# Altium PCB PCB1.PcbDoc
Units mm, origin at the board's own origin, x right, y up, seen from the top; angles counter-clockwise.
Board outline 99.5 x 140.6 mm, 2 copper layers (Top Layer, Bottom Layer); 18 components, 14 nets, 40 pads, 24 vias.
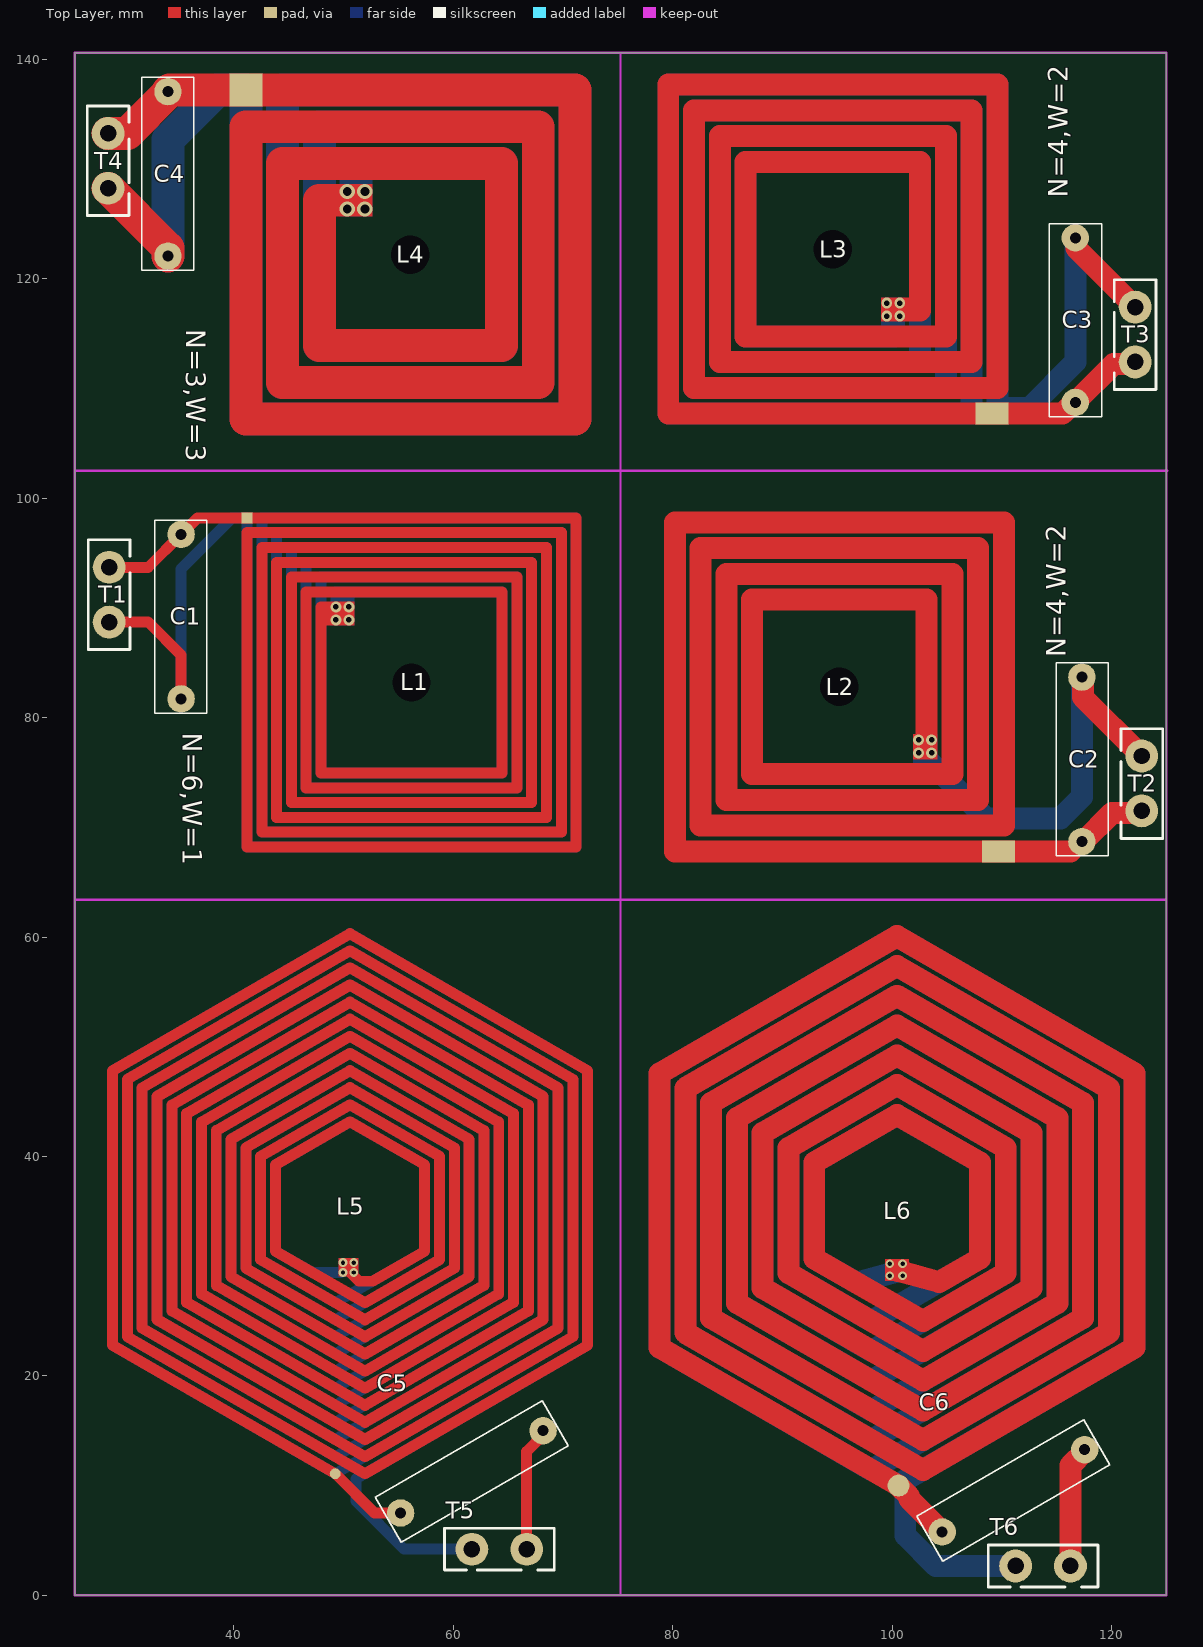
[diagram p0: Top Layer view]
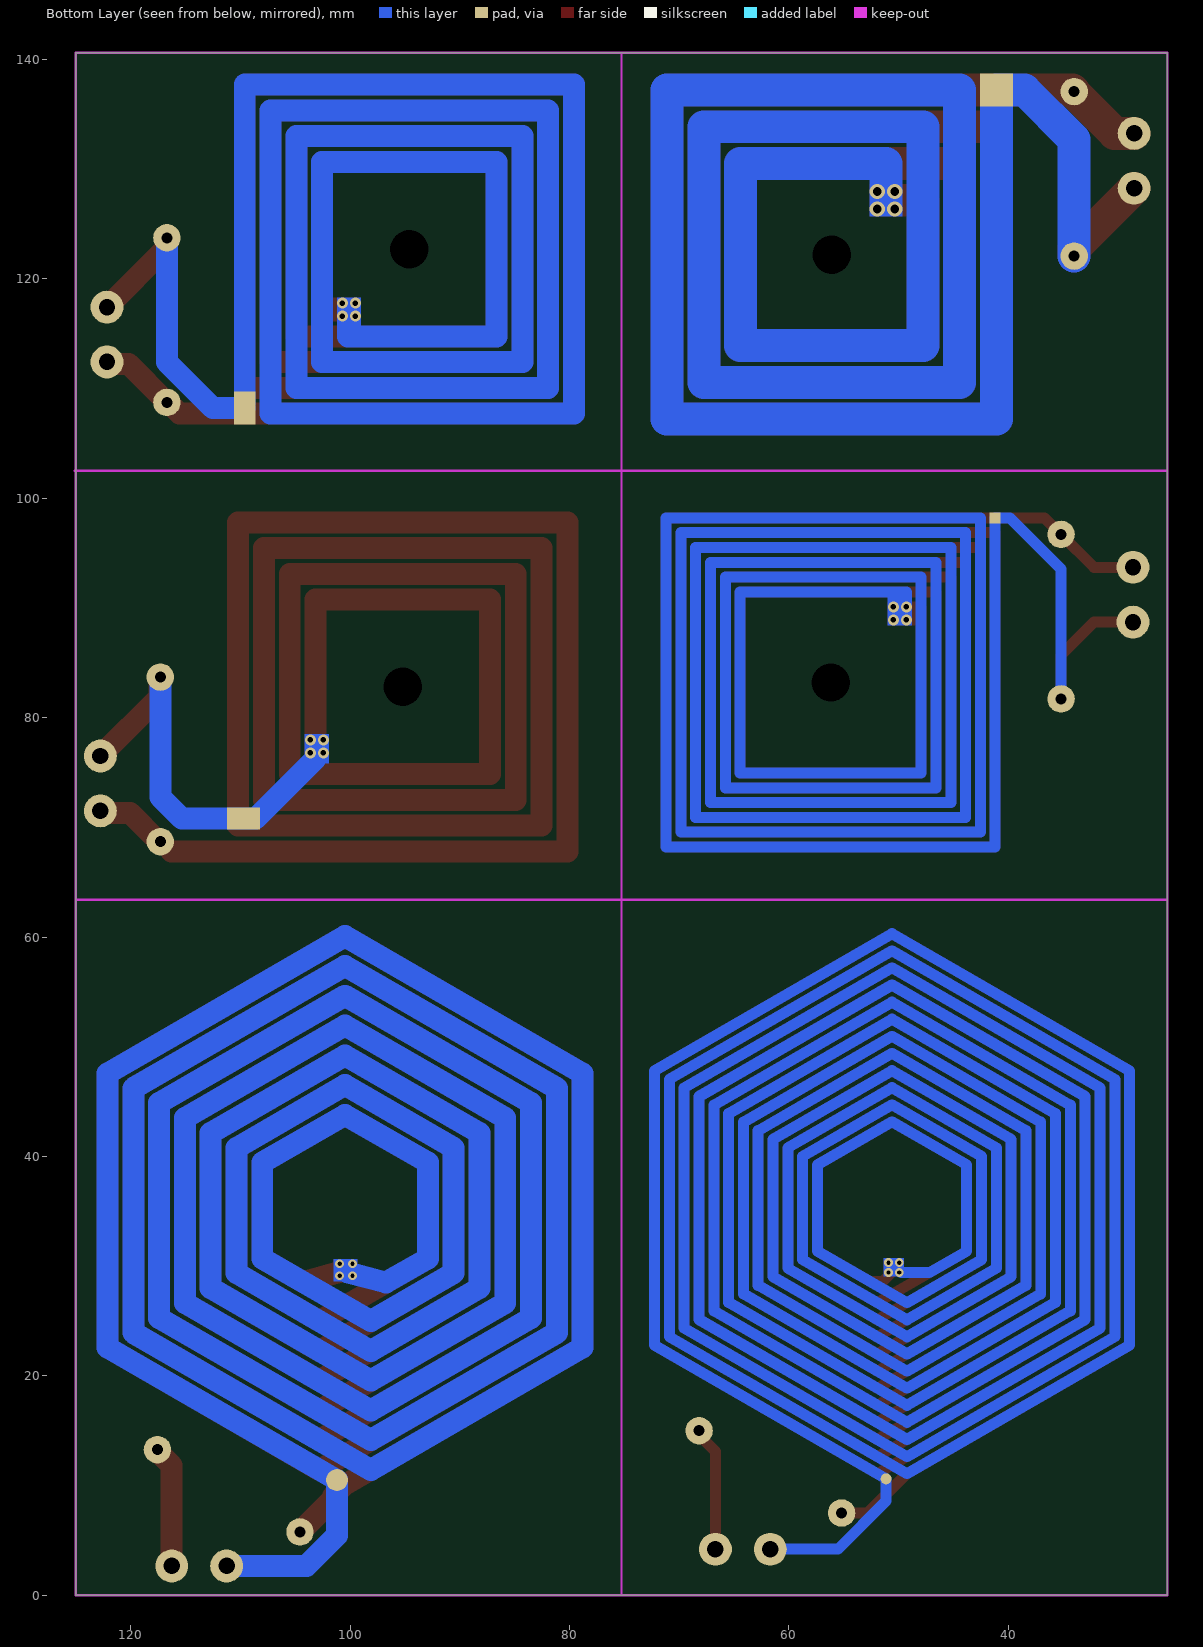
[diagram p1: Bottom Layer view, seen from below]

## Layer stack, top to bottom
Top Solder: solder mask 0.0102, Solder Resist, Dk 3.5
Top Layer: signal copper 0.0356
Dielectric 1: dielectric 0.32, FR-4, Dk 4.8
Bottom Layer: signal copper 0.0356
Bottom Solder: solder mask 0.0102, Solder Resist, Dk 3.5

## Board outline
25.5,0 125,0 125,140.6 25.5,140.6

## Design rules (kind name [scope] priority, off if disabled: settings)
Clearance [All] p1: gap=0.35 ignorepadtopadclearanceinfootprint=FALSE except(0: Arc-Hole Track-Hole SMDPad-Hole THPad-Hole Via-Hole Fill-Hole Poly-Hole Region-Hole Text-Hole)
PolygonConnect [All] p1: connectstyle=Relief reliefconductorwidth=0.254 reliefentries=4 polygonreliefangle="90 Angle" airgapwidth=0.254
RoomDefinition Sheet1 [InComponentClass('Sheet1')] p1 off: confinementstyle=ConfineIn formatcopy=TRUE lockcomponents=FALSE outline 134.4,0 174.457,0 174.457,35.941 134.4,35.941
RoutingVias [All] p1: holewidth=0.7 width=1.5 viastyle="Through Hole" minholewidth=0.5 minwidth=1 maxholewidth=1.5 maxwidth=3
SolderMaskExpansion [All] p1: expansion=0.102 istentingtop=FALSE
Width [All] p1: maxlimit=3 minlimit=0.2 preferedwidth=0.3
30 further rules are at their usual default settings.

## Components (designator, comment, footprint, x,y, rotation, side; value= is the part's Value field where it differs from the comment)
C1 "Cap" CAP_MKT 35.2,96.7 r270 top value=100pF
C2 "Cap" CAP_MKT 117.298,68.689 r90 top value=100pF
C3 "Cap" CAP_MKT 116.698,108.73 r90 top value=100pF
C4 "Cap" CAP_MKT 34.002,137.059 r270 top value=100pF
C5 "Cap" CAP_MKT 68.19,15 r210 top value=100pF
C6 "Cap" CAP_MKT 117.558,13.272 r210 top value=100pF
L1 "PCB coil" COIL_30*30_1MM_2LAYER 56.2,83.2 r0 top net-tie value=10mH
L2 "PCB coil" COIL_30*30_2MM_1LAYER 95.2,82.8 r180 top net-tie value=10mH
L3 "PCB coil" COIL_30*30_2MM_2LAYER 94.6,122.7 r180 top net-tie value=10mH
L4 "PCB coil" COIL_30*30_3MM_2LAYER 56.1,122.2 r0 top net-tie value=10mH
L5 "PCB coil" COIL_HEX_50*50_2layer 50.6,35.3 r90 top net-tie value=10mH
L6 "PCB coil" COIL_HEX_50*50_2LAYER_2mm 100.458,35.072 r90 top net-tie value=10mH
T1 "Terminal" "Terminal 1*2_coil" 30.546,86.207 r90 top
T2 "Terminal" "Terminal 1*2_coil" 120.854,78.99 r270 top
T3 "Terminal" "Terminal 1*2_coil" 120.254,119.906 r270 top
T4 "Terminal" "Terminal 1*2_coil" 30.446,125.756 r90 top
T5 "Terminal" "Terminal 1*2_coil" 59.207,2.295 r0 top
T6 "Terminal" "Terminal 1*2_coil" 108.765,0.767 r0 top

## Footprints (in the part's own frame and the unit in brackets; to place one, negate y for a bottom-side part, rotate by r counter-clockwise, add the part's x,y. Pads: shape width x height; smd on the part's side, far side on the other; paste and mask are expansions set on the pad)
CAP_MKT [mm]
  round 2.5 hole 1: 1(0,0) 2(15,0)
  silkscreen extent -1.29,-2.4 16.3,2.35
COIL_30*30_1MM_2LAYER [mm]
  rect 1x1 smd mask+0.05: 1(-15,15)
  rect 1x1 smd far side mask+0.05: 2(-15,15)
  round 0 hole 3.5: S(0,0)
  Top Layer region: -7.9,5.2 -5.2,5.2 -5.2,7.4 -7.9,7.4
  Top Layer lines w1: -15,15 15,15 15,-15 -15,-15 -15,13.65 13.65,13.65 13.65,-13.65 -13.65,-13.65 -13.65,12.3 12.3,12.3 12.3,-12.3 -12.3,-12.3 -12.3,10.95 10.95,10.95 10.95,-10.95 -10.95,-10.95 -10.95,9.6 9.6,9.6 9.6,-9.6 -9.6,-9.6 -9.6,8.25 8.25,8.25 8.25,-8.25 -8.25,-8.25 -8.25,6.9 -6.9,6.9
  Bottom Layer region: -7.4,5.2 -5.2,5.2 -5.2,8.2 -7.4,8.2
  Bottom Layer lines w1: -15,15 -15,-15 15,-15 15,15 -13.65,15 -13.65,-13.65 13.65,-13.65 13.65,13.65 -12.3,13.65 -12.3,-12.3 12.3,-12.3 12.3,12.3 -10.95,12.3 -10.95,-10.95 10.95,-10.95 10.95,10.95 -9.6,10.95 -9.6,-9.6 9.6,-9.6 9.6,9.6 -8.25,9.6 -8.25,-8.25 8.25,-8.25 8.25,8.25 -6.9,8.25 -6.9,6.9
COIL_30*30_2MM_1LAYER [mm]
  rect 3x2 smd mask+0.05: 1(-14.5,15)
  rect 3x2 smd far side mask+0.05: 2(-14.5,12)
  round 0 hole 3.5: S(0,0)
  Top Layer region: -8.95,4.3 -6.7,4.3 -6.7,6.6 -8.95,6.6
  Top Layer lines w2: -7.95,5.6 -7.95,-7.95 7.95,-7.95 7.95,7.95 -10.3,7.95 -10.3,-10.3 10.3,-10.3 10.3,10.3 -12.65,10.3 -12.65,-12.65 12.65,-12.65 12.65,12.65 -15,12.65 -15,-15 15,-15 15,15 -14.5,15
  Bottom Layer region: -8.95,4.3 -6.7,4.3 -6.7,7 -8.95,7
  Bottom Layer lines w2: -7.95,5.6 -7.95,6.553 -13.397,12 -15,12
COIL_30*30_2MM_2LAYER [mm]
  rect 3x2 smd mask+0.05: 1(-14.5,15)
  rect 2x3 smd far side mask+0.05: 2(-15,14.5)
  round 0 hole 3.5: S(0,0)
  Top Layer region: -7.1,4.4 -4.4,4.4 -4.4,6.6 -7.1,6.6
  Top Layer lines w2: -5.6,5.6 -7.95,5.6 -7.95,-7.95 7.95,-7.95 7.95,7.95 -10.3,7.95 -10.3,-10.3 10.3,-10.3 10.3,10.3 -12.65,10.3 -12.65,-12.65 12.65,-12.65 12.65,12.65 -15,12.65 -15,-15 15,-15 15,15 -14.5,15
  Bottom Layer region: -6.6,4.4 -4.4,4.4 -4.4,7.4 -6.6,7.4
  Bottom Layer lines w2: -5.6,5.6 -5.6,7.95 7.95,7.95 7.95,-7.95 -7.95,-7.95 -7.95,10.3 10.3,10.3 10.3,-10.3 -10.3,-10.3 -10.3,12.65 12.65,12.65 12.65,-12.65 -12.65,-12.65 -12.65,15 15,15 15,-15 -15,-15 -15,13.97
COIL_30*30_3MM_2LAYER [mm]
  rect 3x3 smd mask+0.05: 1(-15,15)
  rect 3x3 smd far side mask+0.05: 2(-15,15)
  round 0 hole 3.5: S(0,0)
  Top Layer region: -6.45,3.45 -3.45,3.45 -3.45,6.45 -6.45,6.45
  Top Layer lines w3: -15,15 15,15 15,-15 -15,-15 -15,11.65 11.65,11.65 11.65,-11.65 -11.65,-11.65 -11.65,8.3 8.3,8.3 8.3,-8.3 -8.3,-8.3 -8.3,4.95 -4.95,4.95
  Bottom Layer region: -6.45,3.45 -3.45,3.45 -3.45,6.45 -6.45,6.45
  Bottom Layer lines w3: -15,15 -15,-15 15,-15 15,15 -11.65,15 -11.65,-11.65 11.65,-11.65 11.65,11.65 -8.3,11.65 -8.3,-8.3 8.3,-8.3 8.3,8.3 -4.95,8.3 -4.95,4.95
COIL_HEX_50*50_2layer [mm]
  round 1 smd mask+0.102: 1(-24.217,1.356)
  round 1 smd far side mask+0.102: 2(-24.685,-0.545)
  Top Layer region: -6.25,-0.775 -4.575,-0.775 -4.575,1.075 -6.25,1.075
  Top Layer lines w1: -24.217,1.356 -12.5,21.651 12.5,21.651 25,0 12.5,-21.651 -12.5,-21.651 -24.221,-1.35 -11.721,20.301 11.721,20.301 23.441,0 11.721,-20.301 -11.721,-20.301 -22.662,-1.35 -10.941,18.951 10.941,18.951 21.882,0 10.941,-18.951 -10.941,-18.951 -21.103,-1.35 -10.162,17.601 10.162,17.601 20.323,0 10.162,-17.601 -10.162,-17.601 -19.544,-1.35 -9.382,16.251 9.382,16.251 18.765,0 9.382,-16.251 -9.382,-16.251 -17.985,-1.35 -8.603,14.901 8.603,14.901 17.206,0 8.603,-14.901 -8.603,-14.901 -16.426,-1.35 -7.823,13.551 7.823,13.551 15.647,0 7.823,-13.551 -7.823,-13.551 -14.868,-1.35 -7.044,12.201 7.044,12.201 14.088,0 7.044,-12.201 -7.044,-12.201 -13.309,-1.35 -6.265,10.851 6.265,10.851 12.529,0 6.265,-10.851 -6.265,-10.851 -11.75,-1.35 -5.485,9.501 5.485,9.501 10.97,0 5.485,-9.501 -5.485,-9.501 -10.191,-1.35 -4.706,8.151 4.706,8.151 9.412,0 4.706,-8.151 -4.706,-8.151 -8.632,-1.35 -3.926,6.801 3.926,6.801 7.853,0 3.926,-6.801 -3.926,-6.801 -6.678,-2.035 -6.678,-0.828 -5.475,0.375
  Bottom Layer region: -6.25,-0.775 -4.575,-0.775 -4.575,1.075 -6.25,1.075
  Bottom Layer lines w1: -5.525,0.45 -5.9,0.825 -5.9,3.382 -3.926,6.801 3.926,6.801 7.853,0 3.926,-6.801 -3.926,-6.801 -8.632,1.35 -4.706,8.151 4.706,8.151 9.412,0 4.706,-8.151 -4.706,-8.151 -10.191,1.35 -5.485,9.501 5.485,9.501 10.97,0 5.485,-9.501 -5.485,-9.501 -11.75,1.35 -6.265,10.851 6.265,10.851 12.529,0 6.265,-10.851 -6.265,-10.851 -13.309,1.35 -7.044,12.201 7.044,12.201 14.088,0 7.044,-12.201 -7.044,-12.201 -14.868,1.35 -7.823,13.551 7.823,13.551 15.647,0 7.823,-13.551 -7.823,-13.551 -16.426,1.35 -8.603,14.901 8.603,14.901 17.206,0 8.603,-14.901 -8.603,-14.901 -17.985,1.35 -9.382,16.251 9.382,16.251 18.765,0 9.382,-16.251 -9.382,-16.251 -19.544,1.35 -10.162,17.601 10.162,17.601 20.323,0 10.162,-17.601 -10.162,-17.601 -21.103,1.35 -10.941,18.951 10.941,18.951 21.882,0 10.941,-18.951 -10.941,-18.951 -22.662,1.35 -11.721,20.301 11.721,20.301 23.441,0 11.721,-20.301 -11.721,-20.301 -24.221,1.35 -12.5,21.651 12.5,21.651 25,0 12.5,-21.651 -12.5,-21.651 -24.685,-0.545
COIL_HEX_50*50_2LAYER_2mm [mm]
  round 2 smd mask+0.102: 1(-25.076,-0.131)
  round 2 smd far side mask+0.102: 2(-24.572,-0.742)
  Top Layer region: -6.442,-1.08 -4.417,-1.08 -4.417,1.12 -6.442,1.12
  Top Layer lines w2: -5.5,-0.075 -6.507,-3.832 -4.359,-7.551 4.359,-7.551 8.719,0 4.359,7.551 -4.359,7.551 -10.075,-2.35 -5.716,-9.901 5.716,-9.901 11.432,0 5.716,9.901 -5.716,9.901 -12.789,-2.35 -7.073,-12.251 7.073,-12.251 14.146,0 7.073,12.251 -7.073,12.251 -15.503,-2.35 -8.43,-14.601 8.43,-14.601 16.859,0 8.43,14.601 -8.43,14.601 -18.216,-2.35 -9.786,-16.951 9.786,-16.951 19.573,0 9.786,16.951 -9.786,16.951 -20.93,-2.35 -11.143,-19.301 11.143,-19.301 22.286,0 11.143,19.301 -11.143,19.301 -23.643,-2.35 -12.5,-21.651 12.5,-21.651 25,0 12.5,21.651 -12.5,21.651 -25.076,-0.131
  Bottom Layer region: -6.45,-1.075 -4.425,-1.075 -4.425,1.125 -6.45,1.125
  Bottom Layer lines w2: -5.625,0.175 -6.574,3.715 -4.359,7.551 4.359,7.551 8.719,0 4.359,-7.551 -4.359,-7.551 -10.075,2.35 -5.716,9.901 5.716,9.901 11.432,0 5.716,-9.901 -5.716,-9.901 -12.789,2.35 -7.073,12.251 7.073,12.251 14.146,0 7.073,-12.251 -7.073,-12.251 -15.503,2.35 -8.43,14.601 8.43,14.601 16.859,0 8.43,-14.601 -8.43,-14.601 -18.216,2.35 -9.786,16.951 9.786,16.951 19.573,0 9.786,-16.951 -9.786,-16.951 -20.93,2.35 -11.143,19.301 11.143,19.301 22.286,0 11.143,-19.301 -11.143,-19.301 -23.643,2.35 -12.5,21.651 12.5,21.651 25,0 12.5,-21.651 -12.5,-21.651 -24.572,-0.742
"Terminal 1*2_coil" [mm]
  round 3 hole 1.5: 1(2.493,1.905) 2(7.493,1.905)
  silkscreen extent 0,0 10,3.81

## Part data
C1 C2 C3 C4 C5 C6: "Capacitor", LatestRevisionDate=17-Jul-2002, LatestRevisionNote="Re-released for DXP Platform.", PackageDescription="Radial Cap, Thru-Hole; 2 Leads; 0.3 in Pin Spacing", PackageReference=RAD-0.3, Published=8-Jun-2000, Publisher="Altium Limited"
L1 L2 L3 L4 L5 L6: library part Inductor, Code_IEC=1005, Code_JEITA=0402, LatestRevisionDate=29-May-2009, LatestRevisionNote="IPC-7351 Footprint Added.", PackageDescription="Chip Inductor", PackageReference=0402-A, Published=8-Jun-2000, Publisher="Altium Limited"
T1 T2 T3 T4 T5 T6: library part "Terminal 1*2", "Terminal 2 Pin 250VAC 16A", ComponentLinkURL=www.picpars.com, Designer="Seyed Mohsen Ghasemain", E-mail=picpars@gmail.com

## Via types
v1: diameter 1, hole 0.5, Top Layer to Bottom Layer, tented both sides, 12 vias
v2: diameter 0.8, hole 0.4, Top Layer to Bottom Layer, tented both sides, 8 vias
v3: diameter 1.4, hole 0.8, Top Layer to Bottom Layer, tented both sides, 4 vias

## Nets (pads, with @x,y where several pads share a name; then routed paths per layer and width w, separated by ;. In a path a pad name is that pad's centre, name@x,y a point inside that pad or via, vN(x,y) a via of type N, cw(c..) or ccw(c..) an arc to the next point about the centre after c; other vN are vias at no path point)
NetC5_1: C5.1 T5.2 | length 11.4
  Top Layer w1: T5.2 66.7,13.104 68.19,14.594 C5.1
NetC6_1: C6.1 T6.2 | length 11.1
  Top Layer w2: T6.2 116.258,11.837 117.558,13.137 C6.1
NetC6_2: C6.2 L6.1 | length 5.9
  Top Layer w2: L6.1 101.563,9.023 101.563,8.777 C6.2
v1: C1.2 L1.2 T1.1 | length 31.6
  Top Layer w1: T1.1 32.2,88.7 35.2,85.7 C1.2
  Bottom Layer w1: C1.2 35.2,93.55 39.85,98.2 L1.2
v2: C1.1 L1.1 T1.2 | length 14.4
  Top Layer w1: T1.2 32.2,93.7 C1.1 36.7,98.2 L1.1
v3: C2.2 L2.2 T2.1 | length 28.8
  Top Layer w2: C2.2 117.394,83.593 117.394,81.862 T2.1
  Bottom Layer w2: L2.2 115.331,70.8 117.298,72.767 C2.2
v4: C2.1 L2.1 T2.2 | length 13.2
  Top Layer w2: L2.1 116.274,67.8 ; C2.1 117.433,68.689 120.05,71.306 122.568,71.306 T2.2
v5: C3.2 L3.2 T3.1 | length 28.7
  Top Layer w2: C3.2 116.794,123.634 116.794,122.778 T3.1
  Bottom Layer w2: L3.2 112.491,108.2 116.698,112.407 C3.2
v6: C3.1 L3.1 T3.2 | length 15
  Top Layer w2: L3.1 115.533,107.7 116.563,108.73 C3.1 120.19,112.222 121.968,112.222 T3.2
v7: C4.2 L4.2 T4.1 | length 28
  Top Layer w3: T4.1 34.002,122.788 C4.2
  Bottom Layer w3: C4.2 34.002,132.675 38.527,137.2 L4.2
v8: C4.1 L4.1 T4.2 | length 14.3
  Top Layer w3: T4.2 30.319,133.249 34.002,136.932 C4.1 34.143,137.2 L4.1
v9: L5.2 T5.1 | length 14.4
  Bottom Layer w1: L5.2 51.145,8.585 55.53,4.2 T5.1
v10: C5.2 L5.1 | length 7.4
  Top Layer w1: L5.1 52.827,7.5 C5.2
v11: L6.2 T6.1 | length 16.3
  Bottom Layer w2: L6.2 101.2,5.463 103.991,2.672 T6.1
pads on no net: L1.S L2.S L3.S L4.S
copper on no net:
  other v1: 102.425,76.775 103.61,76.775 102.425,77.96 103.61,77.96 49.3,88.915 50.485,88.915 49.3,90.1 50.485,90.1 99.515,116.6 100.7,116.6 99.515,117.785 100.7,117.785
  other v2: 99.783,29.122 100.958,29.122 49.95,29.425 50.925,29.425 99.783,30.222 100.958,30.222 49.95,30.325 50.925,30.325
  other v3: 50.35,126.35 51.95,126.35 50.35,127.95 51.95,127.95

## Keep-outs
Keep-Out Layer:
  lines w0.2: 25.5,63.4 125,63.4 ; 25.6,102.5 125.1,102.5 ; 75.25,0 75.25,140.6 ; 25.5,0 25.5,140.6 125,140.6 125,0 25.5,0

## Silkscreen, mask and mechanical layers (free items; w line width, h text height)
Top Overlay:
  text "N=4,W=2" at 116.625,127.403 h3 r90
  text "N=3,W=3" at 35.075,115.397 h3 r270
  text "N=4,W=2" at 116.425,85.503 h3 r90
  text "N=6,W=1" at 34.775,78.597 h3 r270